# Altium PCB Przelacznik_zasilania_Monitroingu.PcbDoc
Units mil, origin at the board's own origin, x right, y up, seen from the top; angles counter-clockwise.
Board outline 1848.3 x 2120.03 mil, 2 copper layers (Top Layer, Bottom Layer); 6 components, 8 nets, 23 pads, 0 vias.
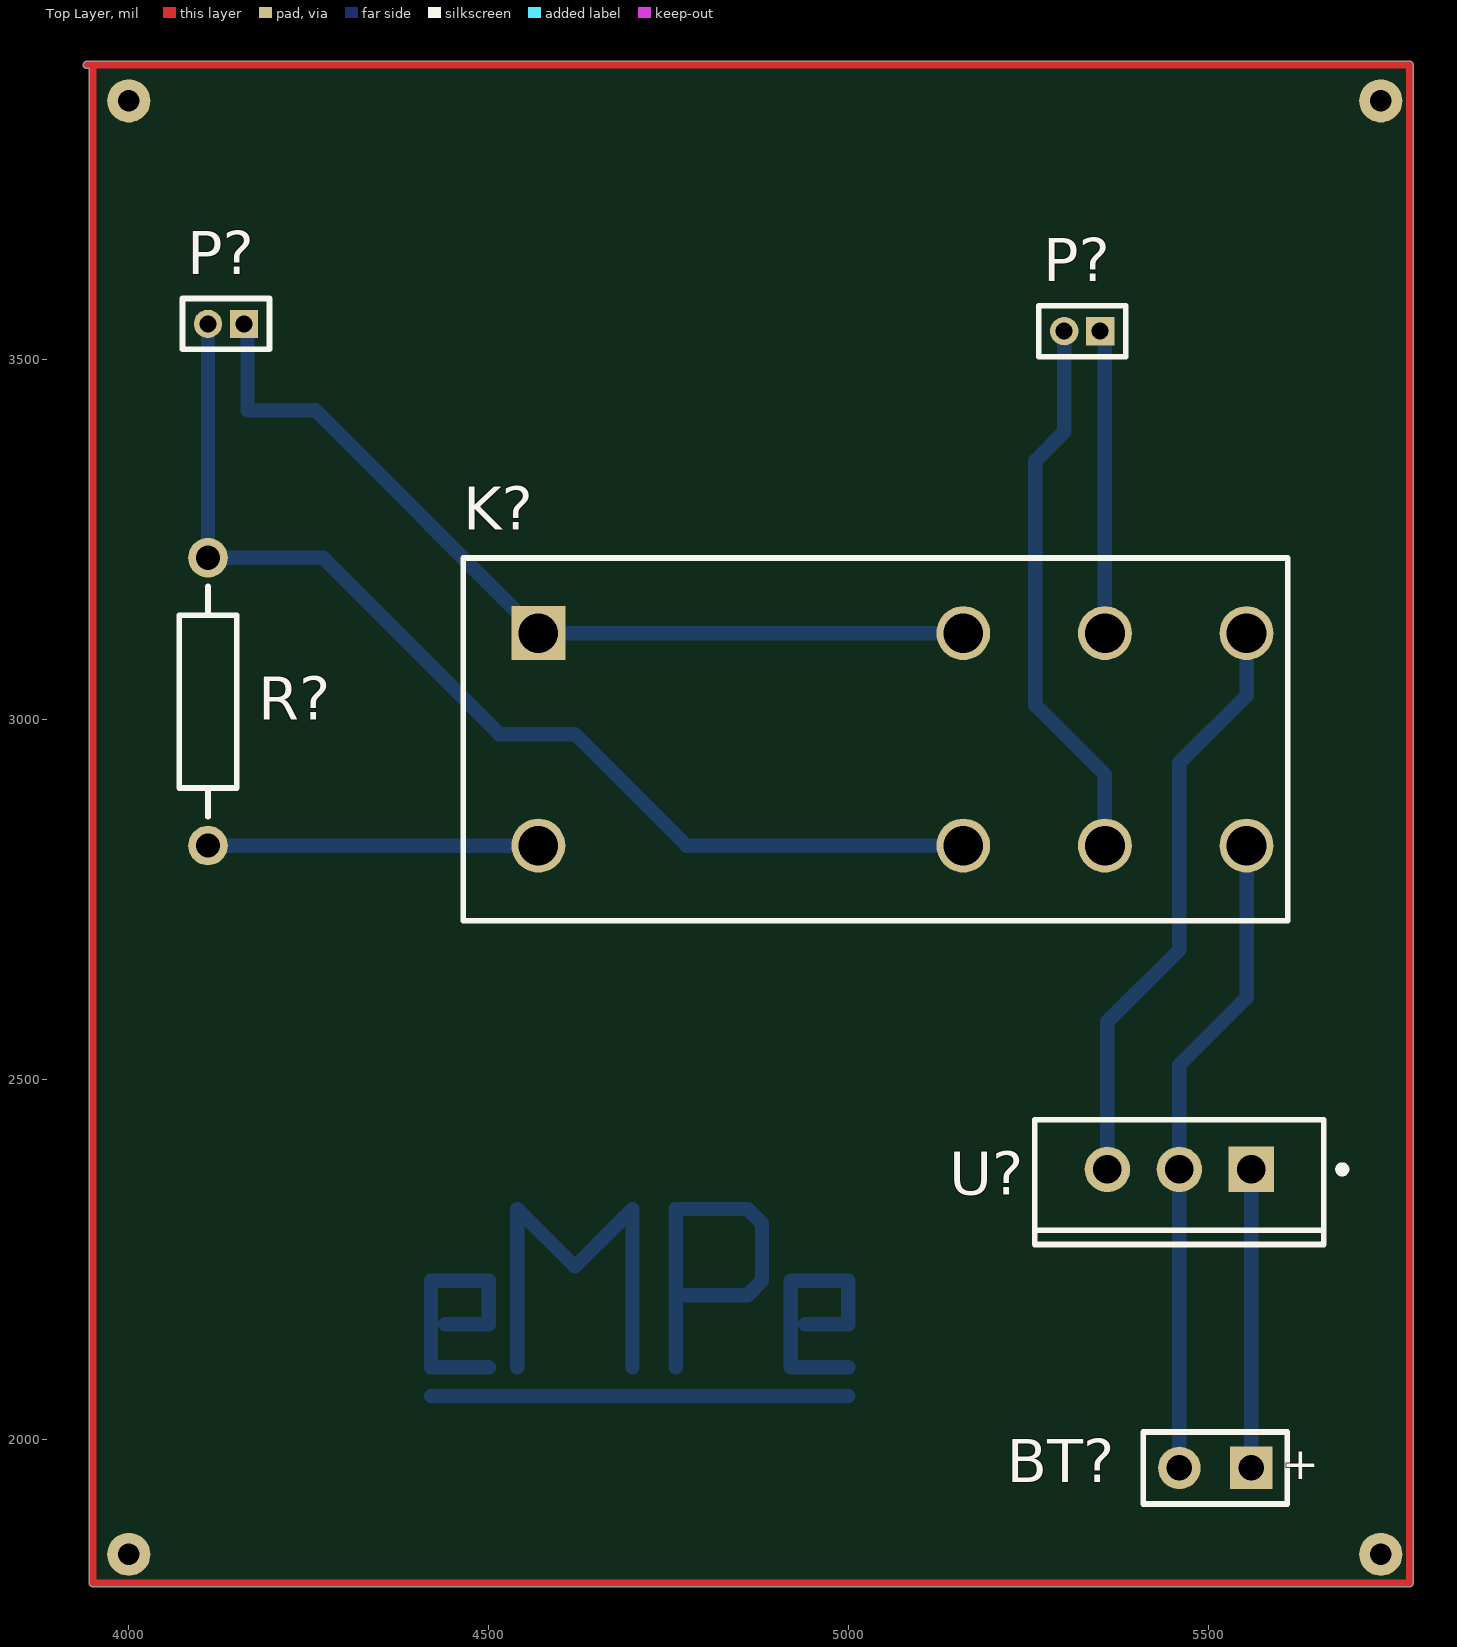
[diagram p0: Top Layer view]
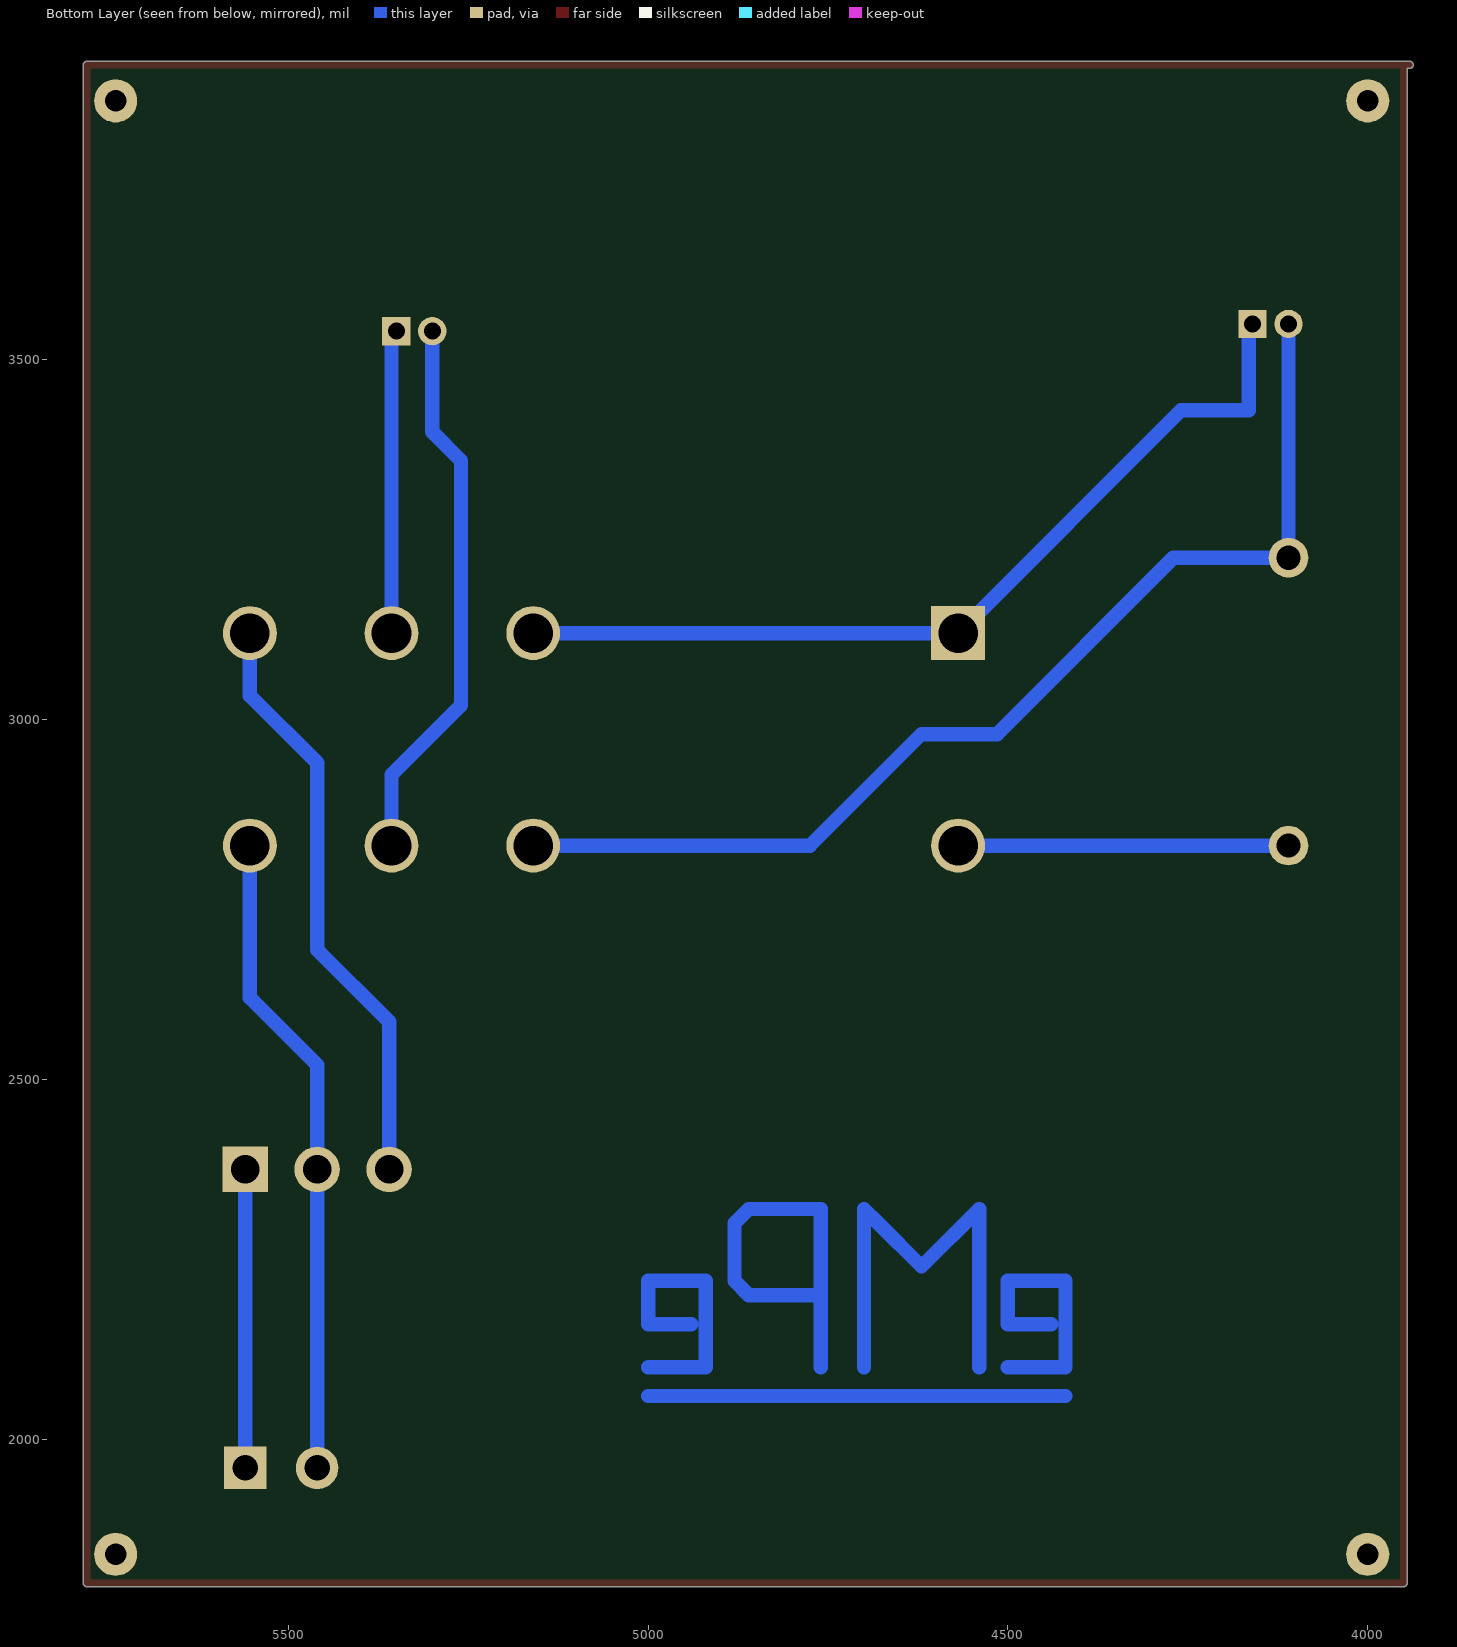
[diagram p1: Bottom Layer view, seen from below]

## Layer stack, top to bottom
Top Solder: solder mask 0.4, Solder Resist, Dk 3.5
Top Layer: signal copper 1.4
Dielectric 1: dielectric 12.6, FR-4, Dk 4.8
Bottom Layer: signal copper 1.4
Bottom Solder: solder mask 0.4, Solder Resist, Dk 3.5

## Board outline
3941.72,3904.99 cw(c3941.72,3910) 3941.72,3915.01 5780,3915.01 cw(c5780,3910) 5785.02,3910 5785.02,1800 cw(c5780,1800) 5780,1794.98 3950,1794.98 cw(c3950,1800) 3944.99,1800 3944.99,3904.99

## Design rules (kind name [scope] priority, off if disabled: settings)
Clearance [All] p1: gap=10
PolygonConnect [All] p1: connectstyle=Relief reliefconductorwidth=10 reliefentries=4 polygonreliefangle="90 Angle" airgapwidth=10
RoutingVias [All] p1: holewidth=28 width=50 viastyle="Through Hole" minholewidth=28 minwidth=50 maxholewidth=28 maxwidth=50
SolderMaskExpansion [All] p1: expansion=4
Width [All] p1: maxlimit=20 minlimit=20 preferedwidth=20 minimp=50.000000 maximp=50.000000 favimp=50.000000
30 further rules are at their usual default settings.

## Classes and differential pairs
component class Przelacznik_zasilania_Monitoringu: BT? K? P? R? U?

## Components (designator, comment, footprint, x,y, rotation, side; value= is the part's Value field where it differs from the comment)
BT? "Battery" BAT-2 5510,1960 r180 top
K? "ALZ11B12" PNSC-LZ-8-2880x1250x1570_V 4569.17,3120.28 r0 top
P? "MHDR1X2" MHDR1X2 4160,3550 r180 top
P? "MHDR1X2" MHDR1X2 5350,3540 r180 top
R? "Res2" AXIAL-0.4 4110,3025 r270 top
U? "IFX25001TS V85" INF-PG-TO220-3-1 5460,2375 r270 top

## Footprints (in the part's own frame and the unit in brackets; to place one, negate y for a bottom-side part, rotate by r counter-clockwise, add the part's x,y. Pads: shape width x height; smd on the part's side, far side on the other; paste and mask are expansions set on the pad)
AXIAL-0.4 [mm] "Axial Device, Thru-Hole; 2 Leads; 0.4 in Pin Spacing"
  round 1.4 hole 0.85: 1(-5.08,0) 2(5.08,0)
  silkscreen extent -4.06,-1.02 4.06,1.02
BAT-2 [mm] "Battery; 2 Leads"
  rect 1.5x1.5 hole 0.9: 1(-1.27,0)
  round 1.5 hole 0.9: 2(1.27,0)
  silkscreen extent -2.54,-1.27 2.54,1.27
INF-PG-TO220-3-1 [mm] "FM, 3-Leads, Body 10x4.4mm, Pitch 2.54mm"
  rect 1.6x1.6 hole 1: 1(0,2.54)
  round 1.6 hole 1: 2(0,0) 3(0,-2.54)
  silkscreen extent -1.75,-5.1 2.65,5.88, body extent -1.75,-5.1 2.65,5.1, height 20.7
MHDR1X2 [mm] "Connector; Header; 2 Position"
  rect 1x1 hole 0.6: 1(0,0)
  round 1 hole 0.6: 2(1.27,0)
  silkscreen extent -0.9,-0.9 2.17,0.9
PNSC-LZ-8-2880x1250x1570_V [mm] "LZ, 8-Leads, Body 28.8x12.5mm"
  rect 1.9x1.9 hole 1.4 mask+0.102: 1(0,0)
  round 1.9 hole 1.4 mask+0.102: 2(15,0) 3(20,0) 4(25,0) 5(25,-7.5) 6(20,-7.5) 7(15,-7.5) 8(0,-7.5)
  silkscreen extent -2.65,-10.15 26.45,2.65, body extent -2.65,-10.15 26.45,2.65, height 16

## Part data
BT?: "Multicell Battery"
K?: "LZ Relays, 12 V Coil Voltage, 400 mW Nominal Operating Power, -40 to 85 degC, 8-Pin LZ, Carton, Case, RoHS"
P? P?: "Header, 2-Pin"
R?: "Resistor"
U?: "Low Dropout Voltage Regulator, 9 to 40 V Operating, 400 mA, -40 to 125 degC, PG-TO220-3-1, Reel, Green"

## Free pads (board coordinates)
  round 60 hole 30: 2(5740,1840) 3(5740,3860) 4(4000,3860) 5(4000,1840)

## Nets (pads, with @x,y where several pads share a name; then routed paths per layer and width w, separated by ;. In a path a pad name is that pad's centre, name@x,y a point inside that pad or via, vN(x,y) a via of type N, cw(c..) or ccw(c..) an arc to the next point about the centre after c; other vN are vias at no path point)
NetBT?_1: BT?.1 U?.1 | length 415
  Bottom Layer w20: BT?.1 U?.1
NetBT?_2: BT?.2 K?.5 U?.2 | length 908.5
  Bottom Layer w10: K?.5@5550,2821.57 K?.5
  Bottom Layer w20: BT?.2 U?.2 5460,2520 5553.43,2613.43 K?.5
NetK?_1: K?.1 K?.2 P?.1@4160,3550 | length 1245.1
  Bottom Layer w10: P?.1@4160,3550 P?.1@4165,3545
  Bottom Layer w20: P?.1@4165,3545 4165,3430 4259.45,3430 K?.1 K?.2
NetK?_3: K?.3 P?.1@5350,3540 | length 427.3
  Bottom Layer w10: P?.1@5356.57,3536.57 P?.1@5360,3540
  Bottom Layer w20: P?.1@5350,3540 5356.57,3533.43 K?.3
NetK?_4: K?.4 U?.3 | length 825.4
  Bottom Layer w20: U?.3 5360,2580 5460,2680 5460,2940 5553.43,3033.43 K?.4
NetK?_6: K?.6 P?.2@5300,3540 | length 771.6
  Bottom Layer w20: P?.2@5300,3540 5300,3400 5260,3360 5260,3020 5356.57,2923.43 K?.6
NetK?_7: K?.7 P?.2@4110,3550 R?.1 | length 1540.4
  Bottom Layer w20: P?.2@4110,3550 R?.1 4270,3225 4515,2980 4620,2980 4775,2825 K?.7
NetK?_8: K?.8 R?.2 | length 459.2
  Bottom Layer w20: R?.2 K?.8
copper on no net: | length 10511.1
  Top Layer w10: 3941.72,3910 3950,3910 ; 3950,3870 3950,3910 ; 3950,3890 3950,1800 5780,1800 5780,3910 3970,3910 3950,3910
  Bottom Layer w20: 4420,2060 5000,2060 ; 4440,2160 4500,2160 4500,2220 4420,2220 4420,2100 4500,2100 ; 4540,2100 4540,2320 4620,2240 4680,2300 4700,2320 4700,2100 ; 4760,2100 4760,2320 4860,2320 4880,2300 4880,2240 4880,2220 4860,2200 4760,2200 ; 4940,2160 5000,2160 5000,2220 4960,2220 4920,2220 4920,2160 4920,2100 4940,2100 4980,2100 5000,2100

## Text inside footprints (layer, text, board x,y; h text height)
BT?: Top Overlay "+" at 5654.49,1982.72 h45.28 r180